# EAGLE board Arduino übung_Carlos (EAGLE 9.7.0)

Size 118.27 x 71.97 mm. Coordinates in mm from the lower left corner, seen from the top.
Outline: 0,0 118.27,0 118.27,71.97 0,71.97 0,0
Copper layers (1*16): Top 0.035mm / dielectric 1.5mm / Bottom 0.035mm
Design rules "default": minimum track width 6mil, minimum drill 0.35mm, track to track 6mil, track to pad 6mil, pad to pad 6mil, via to via 6mil, smd to smd 6mil, copper to edge 40mil, drill to drill 6mil, minimum pad ring 10mil, minimum via ring 8mil, stop-mask expansion 4mil, vias tented up to drill 0mil, thermal gap 10mil

## Footprints (pad centres in the part's own frame; a part is rotated, then mirrored left to right if it is on the bottom)
LEDRD254W60D565H860B_G = drill 0.981 pad 1.581: 1 -1.27,0; 2 1.27,0
LEDRD254W60D565H860B_Y = drill 0.981 pad 1.581: 1 -1.27,0; 2 1.27,0
LEDRD254W60D565H860B = drill 0.981 pad 1.581: 1 -1.27,0; 2 1.27,0
RESAD1016W63L850D250B = drill 0.83 pad 1.43: 1 -5.08,0; 2 5.08,0
SG90 = drill 1.016 long: 1 -2.54,0; 2 0,0; 3 2.54,0
ARDUINO-UNO-R3-SHIELD = drill 1.016 pad 1.88: 3.3V 24.13,-2.54; 5V 24.13,0; A0 24.13,12.7; A1 24.13,15.24; A2 24.13,17.78; A3 24.13,20.32; A4 24.13,22.86; A5 24.13,25.4; AREF -24.13,-13.97; D2 -24.13,20.32; D3 -24.13,17.78; D4 -24.13,15.24; D5 -24.13,12.7; D6 -24.13,10.16; D7 -24.13,7.62; D8 -24.13,3.81; D9 -24.13,1.27; D10 -24.13,-1.27; D11 -24.13,-3.81; D12 -24.13,-6.35; D13 -24.13,-8.89; GND@0 24.13,2.54; GND@1 24.13,5.08; GND@2 -24.13,-11.43; IOREF 24.13,-7.62; NC 24.13,-10.16; RES 24.13,-5.08; RX -24.13,25.4; SCL -24.13,-19.05; SDA -24.13,-16.51; TX -24.13,22.86; VIN 24.13,7.62

## Placement (x,y rotation side)
D1  GREEN  [LEDRD254W60D565H860B_G]  96.97,28.88 180 top
D2  YELLOW  [LEDRD254W60D565H860B_Y]  104.59,28.88 180 top
D3  RED  [LEDRD254W60D565H860B]  112.21,28.88 180 top
R1  1k  [RESAD1016W63L850D250B]  82.46,43.17 90 top
SERVO1  SERVOSG90  [SG90]  81.95,6.99 0 top
UADDI  ARDUINO-UNO-R3-SHIELD  [ARDUINO-UNO-R3-SHIELD]  47.88,42.13 270 top

## Library data of the parts
D1 = Tinkercad; CATEGORY: Opto-Electronic; SUB-CATEGORY: LED; VALUE: LED_GREEN
D2 = Tinkercad; CATEGORY: Opto-Electronic; SUB-CATEGORY: LED; VALUE: LED_YELLOW
D3 = Tinkercad; CATEGORY: Opto-Electronic; SUB-CATEGORY: LED; VALUE: LED_RED
R1 SERVO1 UADDI = Tinkercad

## Nets
D1_C: D1.2 D2.2 D3.2 R1.1
UADDI_3.3V: SERVO1.2 UADDI.3.3V
UADDI_D5: D1.1 UADDI.D5
UADDI_D6: D2.1 UADDI.D6
UADDI_D7: D3.1 UADDI.D7
UADDI_D8: SERVO1.3 UADDI.D8
UADDI_GND: R1.2 SERVO1.1 UADDI.GND@0 UADDI.GND@1 UADDI.GND@2

## Tracks (layer width: path | path; a pad name or v marks a point on that pad's centre or on a via)
D1_C  (3 unrouted)
UADDI_3.3V  (1 unrouted)
UADDI_D5  (1 unrouted)
UADDI_D6  (1 unrouted)
UADDI_D7  (1 unrouted)
UADDI_D8  (1 unrouted)
UADDI_GND  (4 unrouted)